# EAGLE board AVR_12V_reset7_printing (EAGLE 8.5.2)
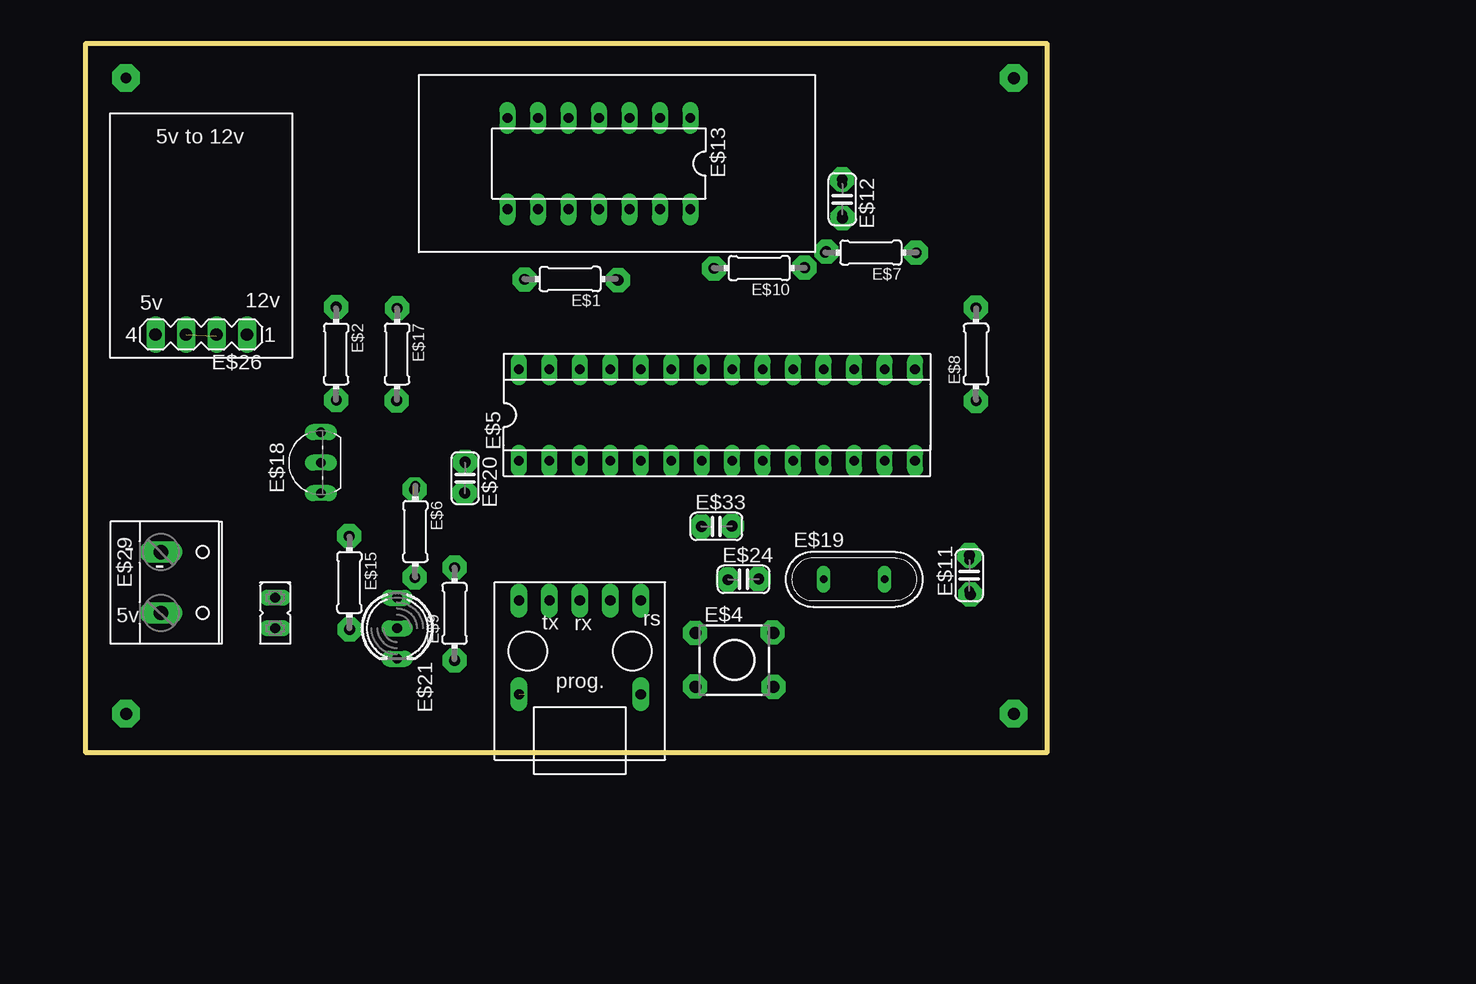
[diagram p0: board, top side]
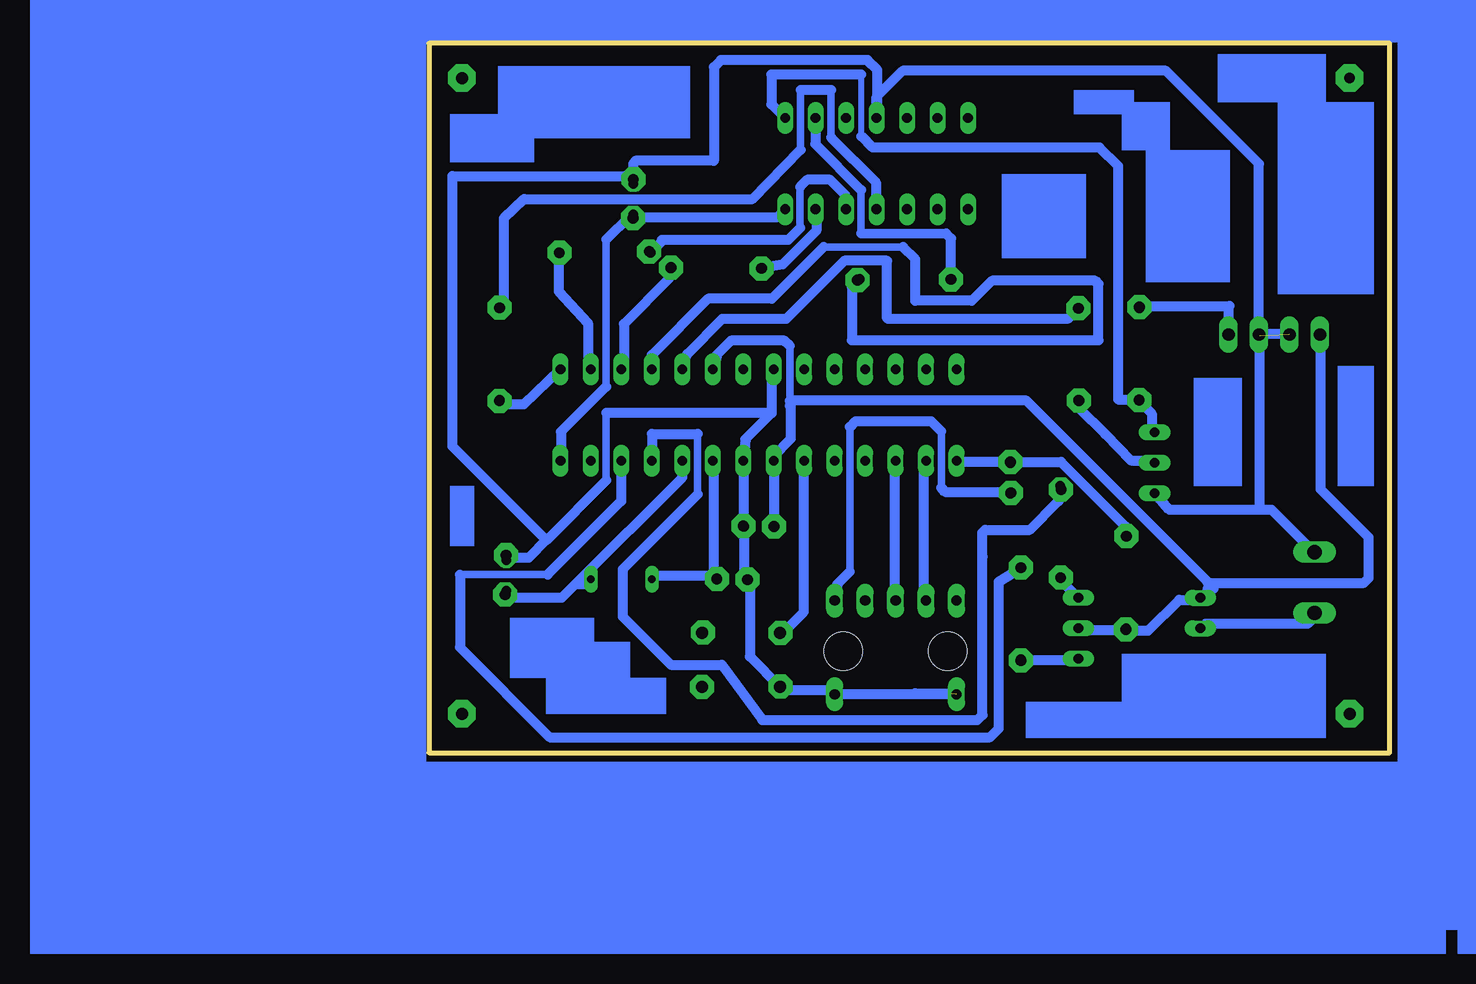
[diagram p1: board, bottom side, seen from below]

Size 80.09 x 59.15 mm. Coordinates in mm from the lower left corner, seen from the top.
Outline: 0,59.15 80.09,59.15 80.09,0 0,0 0,59.15
Copper layers (1*16): Top 0.035mm / dielectric 1.5mm / Bottom 0.035mm
Design rules "default": minimum track width 10mil, minimum drill 24mil, track to track 8mil, track to pad 8mil, pad to pad 8mil, via to via 8mil, smd to smd 8mil, copper to edge 40mil, drill to drill 8mil, minimum pad ring 10mil, minimum via ring 8mil, stop-mask expansion 4mil, vias tented up to drill 0mil, thermal gap 10mil

## Footprints (pad centres in the part's own frame; a part is rotated, then mirrored left to right if it is on the bottom)
0204/7 = drill 0.813 octagon: 1 -3.81,0; 2 3.81,0
FE02-1 = drill 0.813 long: 1 -1.27,0; 2 1.27,0
TL1105 = drill 1 pad 1.676: 1 -2.25,3.25; 2 2.25,3.25; 3 -2.25,-3.25; 4 2.25,-3.25
SOCKET-28-3 = drill 0.813 long: 1 -16.51,-3.81; 2 -13.97,-3.81; 3 -11.43,-3.81; 4 -8.89,-3.81; 5 -6.35,-3.81; 6 -3.81,-3.81; 7 -1.27,-3.81; 8 1.27,-3.81; 9 3.81,-3.81; 10 6.35,-3.81; 11 8.89,-3.81; 12 11.43,-3.81; 13 13.97,-3.81; 14 16.51,-3.81; 15 16.51,3.81; 16 13.97,3.81; 17 11.43,3.81; 18 8.89,3.81; 19 6.35,3.81; 20 3.81,3.81; 21 1.27,3.81; 22 -1.27,3.81; 23 -3.81,3.81; 24 -6.35,3.81; 25 -8.89,3.81; 26 -11.43,3.81; 27 -13.97,3.81; 28 -16.51,3.81
C025-024X044 = drill 0.813 octagon: 1 -1.27,0; 2 1.27,0
DIL14 = drill 0.813 long: 1 -7.62,-3.81; 2 -5.08,-3.81; 3 -2.54,-3.81; 4 0,-3.81; 5 2.54,-3.81; 6 5.08,-3.81; 7 7.62,-3.81; 8 7.62,3.81; 9 5.08,3.81; 10 2.54,3.81; 11 0,3.81; 12 -2.54,3.81; 13 -5.08,3.81; 14 -7.62,3.81
USB-MICRO-PCB = drill 0.85 pad 1.422 long: P$1 -5.08,6.35; P$2 -2.54,6.35; P$3 0,6.35; P$4 2.54,6.35; P$5 5.08,6.35; P$6 -5.08,-1.47; P$7 5.08,-1.47 | hole 3.2: -4.34,2.12; 4.36,2.12
TO92- = drill 0.813 long: 1 2.54,0; 2 0,0; 3 -2.54,0
QS = drill 0.61 long: 1 -2.54,0; 2 2.54,0
DUOLED5MM = drill 0.813 long: AG -2.54,0; AR 2.54,0; K 0,0
MA04-1 = drill 1.016 long: 1 -3.81,0; 2 -1.27,0; 3 1.27,0; 4 3.81,0
W237-132 = drill 1.194 long: 1 -2.54,-0.635; 2 2.54,-0.635

## Placement (x,y rotation side)
E$1  1k  [0204/7]  40.36,39.51 180 top
E$2  1k  [0204/7]  20.86,33.25 270 top
E$3  [FE02-1]  15.78,11.66 90 top
E$4  [TL1105]  54.06,7.74 270 top
E$5  [SOCKET-28-3]  52.61,28.17 0 top
E$6  220  [0204/7]  27.46,18.45 270 top
E$7  1k  [0204/7]  65.43,41.71 180 top
E$8  1k  [0204/7]  74.2,33.25 90 top
E$9  220  [0204/7]  30.73,11.62 90 top
E$10  1k  [0204/7]  56.13,40.42 180 top
E$11  22p  [C025-024X044]  73.64,14.8 90 top
E$12  1uF  [C025-024X044]  63.05,46.17 270 top
E$13  [DIL14]  42.77,49.13 180 top
E$15  10k  [0204/7]  21.97,14.2 270 top
E$16  [USB-MICRO-PCB]  41.18,6.35 0 top
E$17  2.2k  [0204/7]  25.94,33.25 270 top
E$18  s8050  [TO92-]  19.59,24.19 90 top
E$19  [QS]  64.04,14.47 0 top
E$20  0.1uF  [C025-024X044]  31.61,22.9 270 top
E$21  red/green  [DUOLED5MM]  25.94,10.39 270 top
E$24  22p  [C025-024X044]  54.81,14.47 0 top
E$26  [MA04-1]  9.62,34.88 180 top
E$29  [W237-132]  6.89,14.2 270 top
E$33  1uF  [C025-024X044]  52.55,18.88 0 top

## Library data of the parts
E$1 E$2 E$6-E$10 E$15 E$17 = eagle-ltspice
E$3 = con-lsta2
E$4 = switch
E$5 = ic-package
E$11 E$12 E$20 E$24 E$33 = ref-packages
E$13 = 74ac-logic
E$16 = LSGPackages
E$18 = transistor-fet
E$19 = special
E$21 = led
E$26 = con-lstb
E$29 = con-wago-508

## Nets
12V: E$2.1 E$26.1
GND: E$4.4 E$5.8 E$5.22 E$11.2 E$12.1 E$13.4 E$16.P$6 E$16.P$7 E$18.3 E$24.1 E$26.2 E$26.3 E$29.1 E$33.2
S$2: E$1.2 E$13.2
S$3: E$5.15 E$8.1
S$4: E$17.2 E$18.2
S$5: E$5.2 E$16.P$2
S$7: E$2.2 E$13.1 E$18.1
S$8: E$5.14 E$12.2 E$13.14
S$9: E$5.10 E$11.1 E$19.2
S$10: E$5.9 E$19.1 E$24.2
S$11: E$5.3 E$16.P$3
S$12: E$6.2 E$21.AG
S$13: E$5.16 E$7.1
S$14: E$7.2 E$13.12
S$15: E$5.17 E$10.1
S$17: E$1.1 E$5.18
S$18: E$8.2 E$13.11
S$19: E$5.19 E$17.1
S$20: E$16.P$5 E$20.2
S$21: E$4.3 E$5.6
S$22: E$9.1 E$21.AR
S$23: E$5.11 E$6.1
S$24: E$5.12 E$9.2
S$26: E$10.2 E$13.13
S$27: E$5.1 E$15.1 E$20.1
VCC: E$3.2 E$5.7 E$5.20 E$15.2 E$21.K E$26.4 E$33.1
VCC-IN: E$3.1 E$29.2

## Tracks (layer width: path | path; a pad name or v marks a point on that pad's centre or on a via)
12V
  Bottom 0.813: E$2.1 20.65,37.27 13.34,37.27 13.43,37.21 E$26.1
GND  (2 unrouted)
  Bottom 0.61: 65.31,28.34 65.31,22.71 | 51.66,28.34 51.52,28.47 51.52,31.8
  Bottom 0.813: 36.55,4.9 46.24,4.9 E$16.P$7 46.26,5.21 46.28,5.24 50.56,5.24 E$4.4 50.81,5.51 53.34,8.04 53.34,14.27 E$24.1 53.84,14.77 53.84,18.77 E$33.2 53.84,19.27 53.84,24.27 E$5.8 53.71,26.15 51.52,28.33 51.52,31.8 E$5.22 | 39.56,4.98 36.2,4.98 E$16.P$6 | 65.31,22.71 70.3,17.73 70.31,17.74 | 70.31,17.74 71.78,16.27 73.34,16.27 E$11.2 | 51.66,28.34 65.31,28.34 | E$26.3 8.41,34.94 10.84,34.94 10.84,20.27 | 10.84,20.27 9.84,20.27 6.34,16.77 E$29.1 | 10.84,20.27 18.36,20.27 E$18.3 | 10.84,34.77 E$26.2 10.89,49.12 18.64,56.87 40.59,56.87 42.77,54.69 E$13.4 42.7,53 42.7,56.94 43.52,57.77 55.74,57.77 56.34,57.17 56.34,49.37 62.88,49.37 63.05,49.1 E$12.1 63.71,48.09 78.14,48.09 78.14,25.57 70.31,17.74
S$2
  Bottom 0.61: 44.05,46.94 44.05,43.32
  Bottom 0.813: 44.05,43.32 36.98,43.31 36.55,42.88 E$1.2 | E$13.2 47.88,52.91 47.88,50.77 44.05,46.94
S$3
  Bottom 0.813: E$8.1 73.83,29.07 72.17,29.07 E$5.15
S$4
  Bottom 0.813: E$18.2 19.79,24.39 21.59,24.39 23.7,26.57 25.94,28.81 E$17.2
S$5
  Bottom 0.813: E$5.2 38.84,24.27 38.84,12.77 E$16.P$2
S$7
  Bottom 0.508: 44.04,51.41 44.04,56.55
  Bottom 0.813: E$18.1 19.84,26.87 19.84,28.28 20.84,29.28 E$2.2 22.56,29.44 22.63,29.49 22.63,48.92 24.18,50.47 43.09,50.47 44.04,51.41 | E$13.1 51.53,54.08 51.53,56.55 44.04,56.55
S$8
  Bottom 0.61: 65.32,42.79 65.32,30.54
  Bottom 0.813: E$13.14 51.04,44.67 62.83,44.67 E$12.2 63.34,44.77 65.32,42.79 | 65.32,30.54 69.08,26.77 69.08,24.42 E$5.14
S$9
  Bottom 0.813: E$11.1 73.05,12.94 68.99,12.94 67.86,14.07 | 67.86,14.07 67.1,14.07 E$19.2 | 67.86,14.07 58.96,22.97 E$5.10
S$10
  Bottom 0.813: 56.34,14.77 61.34,14.77 E$19.1 | 56.34,14.77 56.34,24.27 E$5.9 | 56.34,14.77 E$24.2
S$11
  Bottom 0.813: E$5.3 41.22,24.34 41.22,12.72 E$16.P$3
S$12
  Bottom 0.813: E$21.AG 27.52,14.51 E$6.2
S$13
  Bottom 0.813: E$5.16 66.84,32.27 66.84,35.84 69.24,38.47 E$7.1
S$14
  Bottom 0.61: 49.14,47.2 49.14,43.77
  Bottom 0.813: 49.14,43.77 50.14,42.77 60.69,42.77 60.66,42.66 E$7.2 | 49.14,47.2 48.55,47.79 46.64,47.79 45.39,46.53 E$13.12
S$15
  Bottom 0.813: E$5.17 63.84,32.27 63.84,35.77 60.08,39.53 E$10.1
S$17
  Bottom 0.61: 40.56,42.17 47.19,42.17
  Bottom 0.813: 47.19,42.17 51.49,37.87 56.8,37.87 61.5,33.17 E$5.18 | 40.56,42.17 39.54,41.15 39.54,37.69 34.82,37.69 33.14,39.37 24.54,39.37 24.26,39.09 24.26,34.41 44.83,34.41 44.83,38.85 E$1.1
S$18
  Bottom 0.61: 46.56,55.29 46.56,51.29 | 49.1,50.29 49.1,55.29
  Bottom 0.813: 46.56,51.29 42.84,47.57 42.84,45.77 E$13.11 | 49.1,55.29 46.56,55.29 | 49.1,50.29 53.12,46.17 72.14,46.17 73.84,44.57 73.84,37.27 E$8.2
S$19
  Bottom 0.813: E$17.1 26.77,36.23 41.9,36.23 41.9,41.04 45.45,41.04 50.32,36.17 55.64,36.17 58.54,33.27 58.96,32.25 E$5.19
S$20
  Bottom 0.61: 37.38,26.8 37.38,22.1 | 44.99,15.12 44.99,27.17
  Bottom 0.813: 37.38,22.1 37.05,21.77 31.84,21.77 E$20.2 | 37.38,26.8 38.22,27.65 44.51,27.65 44.99,27.17 | 44.99,15.12 46.03,14.08 E$16.P$5
S$21
  Bottom 0.813: E$5.6 48.84,24.27 48.84,11.77 50.34,10.27 E$4.3
S$22
  Bottom 0.813: E$21.AR 26.34,7.77 30.64,7.77 E$9.1
S$23
  Bottom 0.61: 57.69,26.59 57.69,21.55
  Bottom 0.813: E$6.1 27.59,22.26 27.59,21 30,18.59 33.73,18.59 33.96,18.36 33.94,16.35 33.94,3.16 34.36,2.74 52.29,2.74 55.66,7.34 59.91,7.34 63.94,11.37 63.94,15.3 57.69,21.55 | 57.69,26.59 61.5,26.59 E$5.11
S$24
  Bottom 0.61: 70.18,14.86 77.5,14.86
  Bottom 0.813: 77.5,14.86 77.5,8.8 70.01,1.31 33.31,1.31 32.58,2.04 32.58,14.28 E$9.2 | 70.18,14.86 64.05,20.99 64.05,24.36 E$5.12
S$25  (via drill 0.9 pad 2)
  other vias: 31.61,24.25
S$26
  Bottom 0.813: E$13.13 47.79,45.26 47.79,43.53 50.61,40.72 E$10.2
S$27
  Bottom 0.813: E$15.1 21.97,18.85 27.39,24.27 31.34,24.27 E$20.1 31.84,24.27 35.84,24.27 E$5.1
S$28  (via drill 0.9 pad 2)
  other vias: 31.56,21.69
S$29  (via drill 0.9 pad 2)
  other vias: 25.9,29.38
S$30  (via drill 0.9 pad 2)
  other vias: 27.39,21.95
S$31  (via drill 0.9 pad 2)
  other vias: 27.42,14.61
S$32  (via drill 0.9 pad 2)
  other vias: 30.74,15.44
S$33  (via drill 0.9 pad 2)
  other vias: 30.74,7.69
S$34  (via drill 0.9 pad 2)
  other vias: 25.94,37.06
S$35  (via drill 0.9 pad 2)
  other vias: 20.85,37.17
S$36  (via drill 0.9 pad 2)
  other vias: 36.58,39.48
S$37  (via drill 0.9 pad 2)
  other vias: 44.37,39.41
S$38  (via drill 0.9 pad 2)
  other vias: 52.36,40.39
S$39  (via drill 0.9 pad 2)
  other vias: 59.9,40.47
S$40  (via drill 0.9 pad 2)
  other vias: 61.72,41.81
S$41  (via drill 0.9 pad 2)
  other vias: 69.21,41.69
S$42  (via drill 0.9 pad 2)
  other vias: 63.08,44.57
S$43  (via drill 0.9 pad 2)
  other vias: 63.04,47.81
S$44  (via drill 0.9 pad 2)
  other vias: 50.78,10.01
S$45  (via drill 0.9 pad 2)
  other vias: 57.25,10.04
S$46  (via drill 0.9 pad 2)
  other vias: 57.34,5.5
S$47  (via drill 0.9 pad 2)
  other vias: 50.78,5.55
S$48  (via drill 0.9 pad 2)
  other vias: 74.19,37.11
S$49  (via drill 0.9 pad 2)
  other vias: 74.21,29.35
S$50  (via drill 0.9 pad 2)
  other vias: 73.74,13.19
S$51  (via drill 0.9 pad 2)
  other vias: 73.66,16.48
S$52  (via drill 0.9 pad 2)
  other vias: 51.32,18.88
S$53  (via drill 0.9 pad 2)
  other vias: 53.88,18.92
S$54  (via drill 0.9 pad 2)
  other vias: 53.53,14.44
S$55  (via drill 0.9 pad 2)
  other vias: 56.09,14.5
S$56  (via drill 0.9 pad 2)
  other vias: 20.88,29.42
S$57  (via drill 0.9 pad 2)
  other vias: 21.93,18.06
S$58  (via drill 0.9 pad 2)
  other vias: 21.99,10.28
S$59  (via drill 0.9 pad 2.3)
  other vias: 3.34,56.27
S$60  (via drill 1 pad 2.3)
  other vias: 77.34,3.27
S$61  (via drill 1 pad 2.3)
  other vias: 77.34,56.27
S$62  (via drill 1 pad 2.3)
  other vias: 3.34,3.27
VCC
  Bottom 0.508: 50,28.95 50,29.37
  Bottom 0.61: 50,29.37 50,33.94
  Bottom 0.813: E$33.1 51.34,19.27 E$5.7 51.34,24.77 49.93,26.18 49.93,28.88 50,28.95 | 50,33.94 50.42,34.37 54.91,34.37 56.08,33.2 E$5.20 | E$21.K 25.84,10.27 22.45,10.27 E$15.2 21.77,10.19 20.12,10.19 17.54,12.77 15.84,12.77 E$3.2 15.03,13.51 | 15.03,13.51 | 15.06,14.17 15.18,14.17 14.68,13.67 15.19,13.67 15.03,13.51 | 15.06,14.17 2.14,14.17 1.74,14.57 1.74,17.97 5.74,21.97 5.74,34.87 E$26.4 | 50,29.37 30.26,29.37 15.06,14.17
VCC-IN
  Bottom 0.813: E$3.1 15.34,10.77 6.84,10.77 6.34,11.27 E$29.2
(copper drawn outside any net)
  shapes: Bottom area x23

## Text on the board
tPlace: 5v to 12v | 5v | 12v | - | - | 5v | tx | rx | rs | prog.